# Altium PCB B45120517E.PcbDoc (part 2 of 2)
Units mil, origin at the board's own origin, x right, y up, seen from the top; angles counter-clockwise.
Board outline 4000 x 6000 mil, 2 copper layers (Top Layer, Bottom Layer); 156 components, 88 nets, 425 pads, 290 vias.
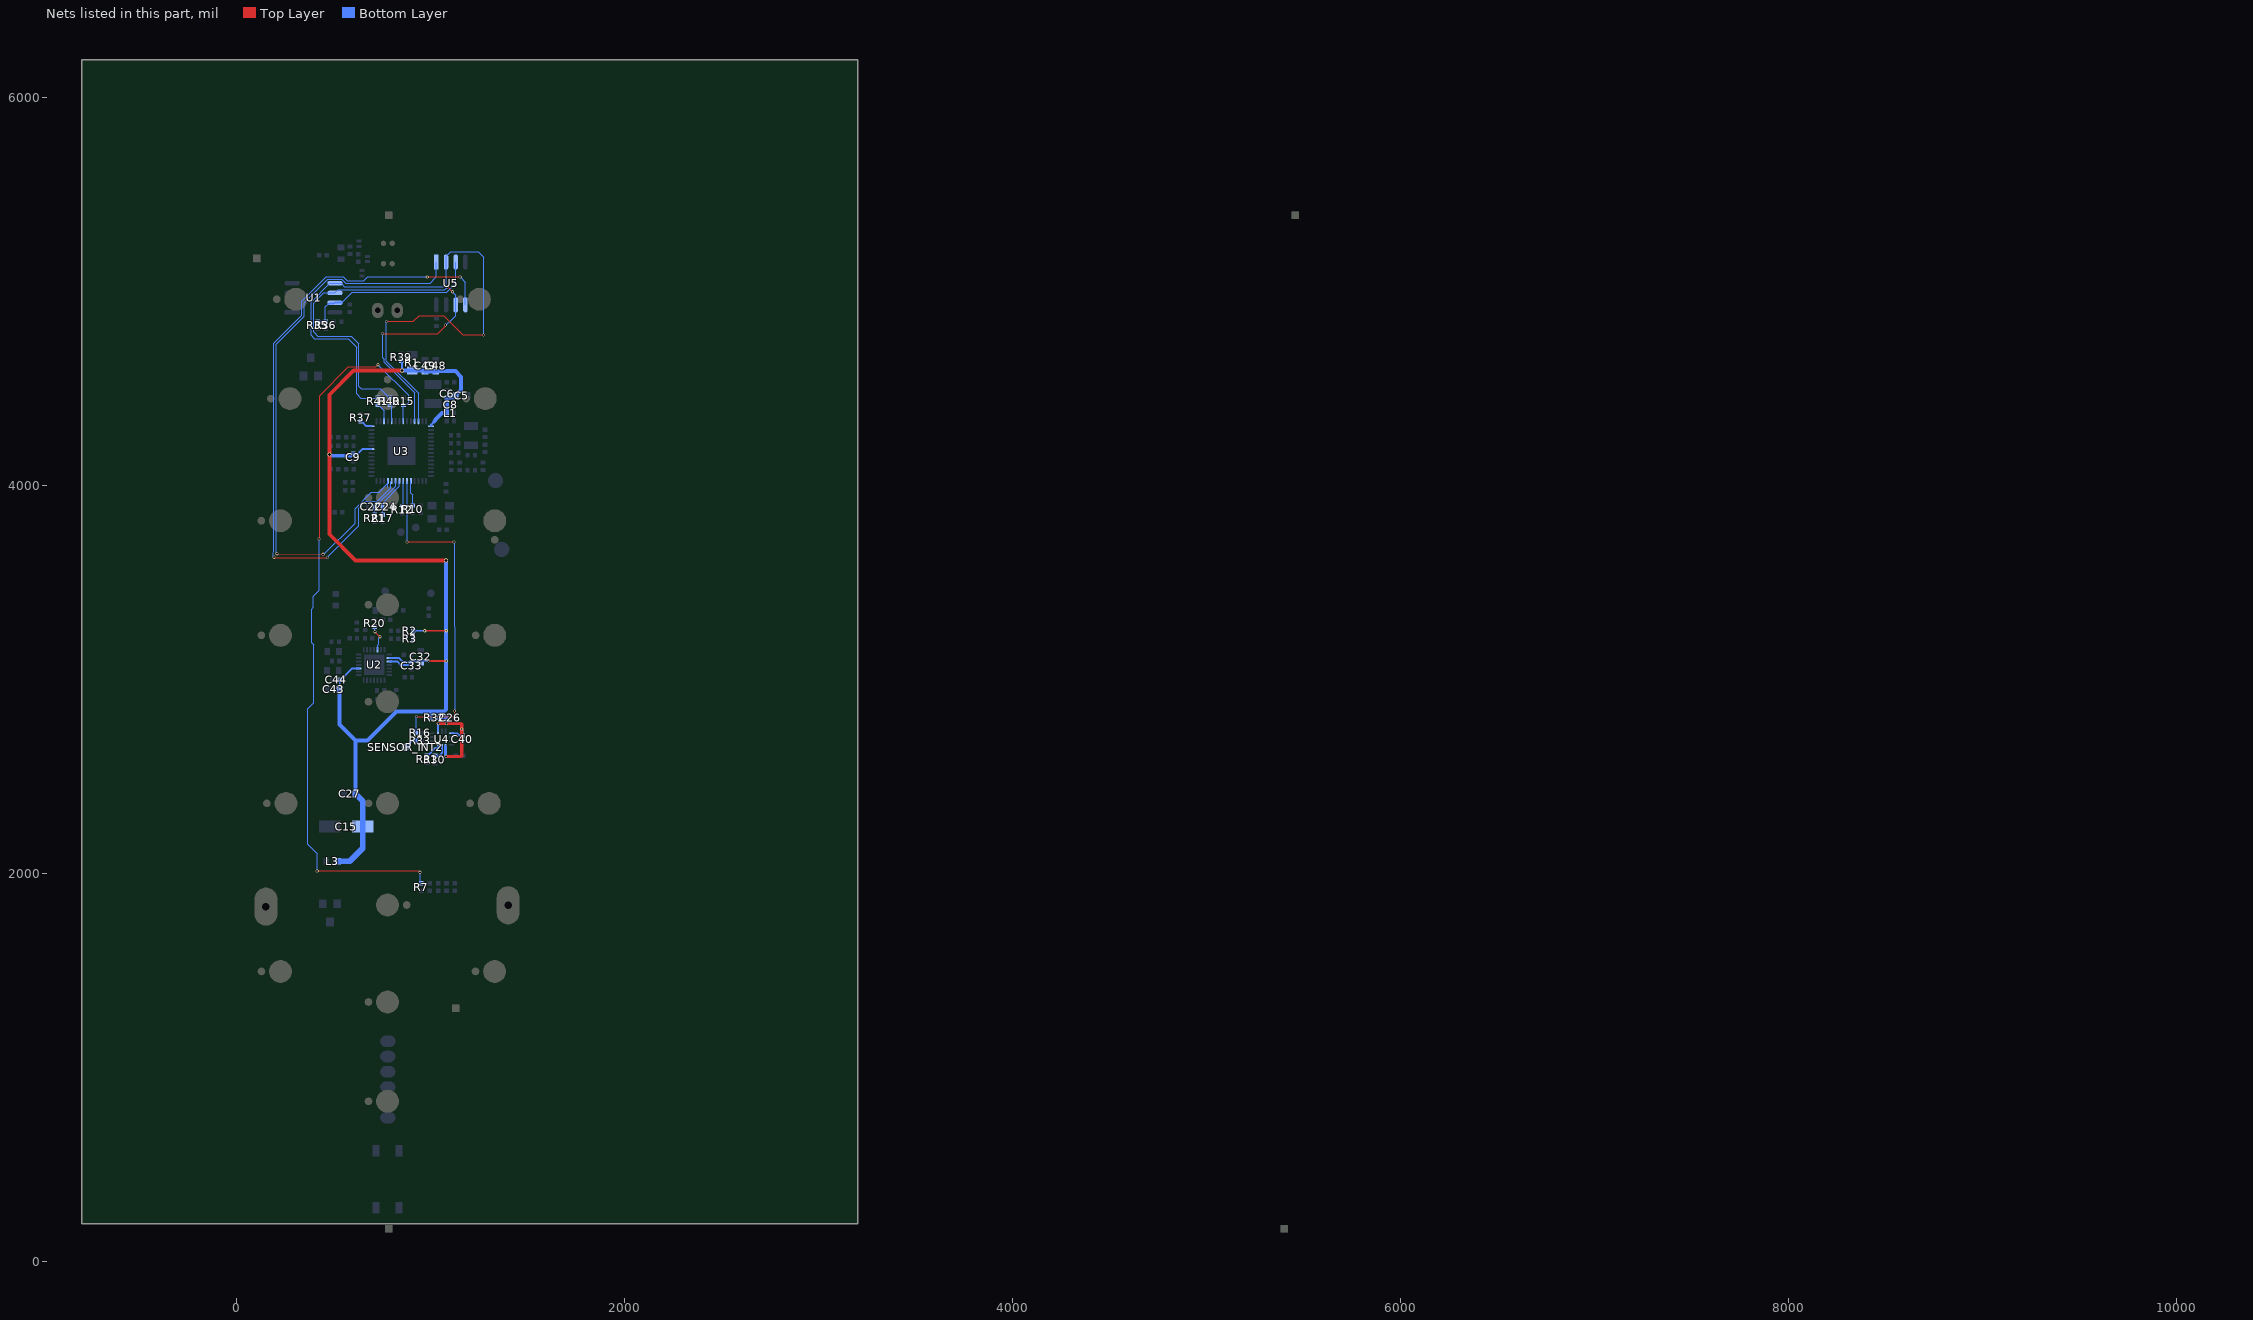
[diagram p2: the nets of this part, all layers, seen from the top]

## Via types
v1: diameter 16, hole 10, Top Layer to Bottom Layer, tented both sides, 284 vias
v2: diameter 20, hole 16, Top Layer to Bottom Layer, tented both sides, 6 vias

## Nets (pads, with @x,y where several pads share a name; then routed paths per layer and width w, separated by ;. In a path a pad name is that pad's centre, name@x,y a point inside that pad or via, vN(x,y) a via of type N, cw(c..) or ccw(c..) an arc to the next point about the centre after c; other vN are vias at no path point) (continued)
NetR20_1: R20.1 U2.26 | length 129.3
  Top Layer w6: v1(715,3247) v1@738,3224
  Bottom Layer w6: v1(715,3247) R20.1@715,3272 ; U2.26@728.72,3154.74 728.72,3177.75 734,3183.03 734,3213 v1(742,3221)
NetR30_1: R30.1 U4.13 | length 74
  Bottom Layer w10: R30.1@1025,2607 1046,2607 1060.19,2621.19 U4.13@1060.19,2654.12
NetR31_1: R31.1 U4.14 | length 80.1
  Bottom Layer w10: R31.1@984,2605 1027.55,2648.55 1040.5,2648.55 U4.14@1040.5,2654.12
NetR33_1: R33.1 SENSOR_INT2.1 | length 70.5
  Bottom Layer w12: SENSOR_INT2.1@873,2651 908,2686 R33.1@929,2686
NetR37_2: R37.2 U3.42 | length 61.2
  Bottom Layer w10: R37.2@647,4331 671.89,4306.11 U3.42@697.91,4306.11
P2_1: R7.2 R15.1 U3.50 | length 3840.3
  Top Layer w6: v1(418,2014) 941,2014 v1(948,2007) v1@949,2006 ; v1@430,3722 430,4463.04 578.96,4612 720,4612 v1(731,4623)
  Bottom Layer w6: v1(418,2014) 418,2102 369,2151 369,2850 399,2880 399,3181.04 389,3191.04 389,3363.24 398,3372.24 398,3430 428,3460 v1(428,3725) ; v1(731,4623) 888.67,4465.33 888.67,4430.67 873,4415 R15.1@863,4415 861.3,4413.3 U3.50@861.3,4331.7 ; v1(948,2007) 948,1957 R7.2@955,1950
PIO3: U3.24 U5.5 | length 3264.8
  Top Layer w6: v1(195,3631) 197,3629 468,3629 v1@470,3631 ; v1(985,5076) v1(1155,5076)
  Bottom Layer w6: v1(195,3631) 192,3634 192,3655.04 195,3658.04 195,4734 339,4878 339,4950 ; 339.04,4950 349,4959.96 ; 349,4960 465,5076 553,5076 573,5056 658.16,5056 678.16,5076 v1(985,5076) ; v1(470,3630) 633,3793 633,3884 669,3920 728,3920 796.48,3988.48 796.48,4018.85 U3.24@802.24,4024.61 ; v1(1155,5076) 1182,5049 U5.5@1182,4931.76
PIO4: U3.25 U5.1 | length 2983.7
  Top Layer w6: v1(210,3649) v1(448.04,3646)
  Bottom Layer w6: v1@208,3648 208,4729 351,4872 351,4941.75 473.06,5063.81 545.42,5063.81 565.23,5044 1000,5044 1032,5076 U5.1@1032,5152.23 ; v1(448.04,3646) 452,3646 613,3807 613,3881.76 697.24,3966 737,3966 U3.25@782.56,4011.56 ; 782.56,3991.53 U3.25@782.56,4011.56 ; U3.25@782.56,4024.61 U3.25@782.56,4011.56 ; U3.25@783,4012 U3.25@782.56,4011.56
RX: R12.1 U3.21 | length 128.6
  Bottom Layer w6: R12.1@861.3,3896 U3.21@861.3,4024.61
SCL: R40.2 U1.6 U3.53 U5.6 | length 2640.2
  Top Layer w6: v1(755,4783) 1038,4783 1080,4825 v1(1080,4827) ; v1(1090,5024) v1(1115,4999)
  Bottom Layer w6: v1(755,4783) 755,4658 762.69,4650.31 762.69,4635.34 920.35,4477.68 U3.53@920.35,4331.7 ; R40.2@793,4454 793,4459 783,4459 742,4500 646,4500 633,4513 633,4731 594,4770 421.27,4770 399,4792.27 399,4941 451,4993 U1.6@509.24,4993 526.24,5010 1076,5010 v1(1090,5024) ; v1(1080,4827) 1111,4854 1132,4875 U5.6@1132,4931.76 1132,4982 v1(1115,4999)
SCL1: C24.2 R17.2 U3.22 | length 210.9
  Bottom Layer w6: R17.2@756,3850 755,3851 C24.2@755,3891 755,3910 841.61,3996.61 U3.22@841.61,4024.61
SCL-1: R40.1 U3.47 | length 88.1
  Bottom Layer w6: R40.1@793,4416 802.24,4406.76 U3.47@802.24,4331.7
SDA: R41.2 U1.5 U3.54 U5.2 | length 3435.3
  Top Layer w6: v1(774.69,4846) 914,4846 944,4876 1070,4876 1169,4777 v1(1276,4777)
  Bottom Layer w6: R41.2@731,4451 642.14,4451 621,4472.14 621,4714 577,4758 404,4758 386,4776 386,4946 483,5043 U1.5@509.24,5043 541.2,5043 558.2,5026 1068.2,5026 1073,5030.8 1073,5031.04 1082.01,5040.06 U5.2@1082.01,5152.24 1082.01,5181 1107.01,5206 1247,5206 1276,5177 v1(1276,4777) ; v1(774.69,4846) 774.69,4640.31 940.04,4474.96 U3.54@940.04,4331.7
SDA1: C22.2 R21.2 U3.23 | length 218.9
  Bottom Layer w6: R21.2@715,3850 C22.2@715,3890 ; C22.2@715,3890 821.93,3996.96 U3.23@821.93,4024.61
SDA-1: R41.1 U3.45 | length 97.8
  Bottom Layer w6: R41.1@731.5,4416.5 762.87,4385.13 U3.45@762.87,4331.7
SENSOR_INT: R16.1 U3.20 | length 1730.2
  Top Layer w6: v1(880.98,3710) v1@1123,3710 ; v1(929,2809) 1115,2809 1126,2820 v1(1126,2838)
  Bottom Layer w6: v1(880.98,3710) U3.20@880.98,4024.61 ; R16.1@929,2727 v1(929,2809) ; v1(1124,3710) v1(1126,2838)
TX: R10.1 U3.19 | length 132.5
  Bottom Layer w6: U3.19@900.67,4024.61 900.67,3961.67 910,3952.34 R10.1@910,3896
VBAT: C5.1 C6.1 C8.1 C9.1 C15.1 C27.1 C32.1 C33.1 C43.1 C44.1 C48.1 C49.1 L1.1 L3.1 R1.2 R2.1 R3.1 R32.2 R39.2 U2.2 U2.3 U2.17 U3.1 U3.36 | length 5921
  Top Layer w10: v1(972,3252) v1(1083,3252) ; v1(992,3097) v1(1083,3097)
  Top Layer w20: v2(854,4593) 606,4593 481,4468 v2(481,4160) 481,3749 616,3614 v2(1082,3614)
  Bottom Layer w10: C43.1@533,2950 534,2951 C44.1@534,2999 540,2999 599.28,3058.28 U2.17@632.26,3058.28 ; C9.1@603,4164 627,4164 651,4188 U3.36@697.91,4188 ; U2.3@789.74,3093.72 830.28,3093.72 849,3075 887,3075 C33.1@902,3090 ; U2.2@789.74,3111.43 840.57,3111.43 862,3090 C33.1@902,3090 ; v2(854,4593) R39.2@854,4640 ; R3.1@912,3211 R3.1@913,3211 R2.1@913,3252 ; R2.1@915,3252 v1(972,3252) ; v1(992,3097) 913,3097 C33.1@906,3090 C33.1@902,3090 ; U3.1@1005,4306.11 1005,4314.63 1021.37,4331
  Bottom Layer w20: v2(481,4160) 487,4154 593,4154 C9.1@603,4164 ; C43.1@533,2950 533,2768 615,2686 616,2687 ; C27.1@616,2411 616,2687 ; v2(854,4593) R1.2@908,4593 968,4593 C49.1@974,4587 C48.1@1029,4587 1032,4590 1130,4590 1160,4560 1160,4492 C5.1@1132,4464 1123,4455 C6.1@1087,4455 1087,4376 L1.1@1085,4374 1062.06,4374 1028,4339.94 1028,4337.63 1021.37,4331 ; R32.2@1005.19,2804 1005.19,2829.39 ; v2(1082,3614) 1082,2846 1072,2836 826,2836 677,2687 616,2687
  Bottom Layer w30: L3.1@525,2064 586,2064 652.84,2130.84 C15.1@652.84,2243 652.84,2374.16 C27.1@616,2411
VDD_SENSOR: C26.1 C40.1 R32.1 U4.5 U4.8 U4.12 | length 624.3
  Top Layer w16: v1@1042,2773.19 v1(1084.19,2773.19) 1159.81,2773.19 1163,2770 v1(1163,2745) 1163,2606 1160,2603 v1(1081,2603)
  Bottom Layer w10: U4.5@1040.5,2733.88 v1@1040.5,2771.5 ; U4.8@1109.91,2723.53 1138.47,2723.53 1149,2713 C40.1@1166,2713
  Bottom Layer w16: U4.12@1079.87,2654.12 1079.87,2604.13 v1(1081,2603) ; v1(1084.19,2773.19) C26.1@1084.19,2804 ; v1(1163,2745) 1163,2716 C40.1@1166,2713
  Bottom Layer w20: R32.1@1043.19,2804 C26.1@1084.19,2804
  other v1: 1042,2773
WP: R35.2 R36.2 U1.7 U5.3 | length 947.6
  Bottom Layer w6: R36.2@460.69,4846 460.69,4920.69 U1.7@478.87,4938.87 ; U1.7@545,4943 598,4996 1086.04,4996 1132.01,5041.97 U5.3@1132.01,5152.24
  Bottom Layer w10: R35.2@420,4845 459.69,4845 R36.2@460.69,4846 ; U1.7@478.87,4938.87 505.11,4938.87 U1.7@509.24,4943 U1.7@545,4943
pads on no net: MARK1.1 MARK1.4 MARK2.1 MARK2.4 MARK3.1 MARK3.4 MARK4.1 MARK4.4 MARK5.1 MARK5.4 MARK6.1 MARK6.4 MARK7.1 MARK7.4 MARK8.1 MARK8.4 MARK9.1 MARK10.1 MARK10.4 MARK11.1 MARK12.1 MARK12.4 U2.9 U2.10 U2.11 U2.12 U2.14 U2.15 U2.16 U2.23 U2.24 U3.0@669.44,4070.14 U3.0@669.44,4168.17 U3.0@669.44,4267.15 U3.0@762.47,4358.17 U3.0@782.47,3996.17 U3.0@861.45,4358.17 U3.0@880.46,3996.17 U3.0@959.44,4358.17 U3.0@979.44,3996.17 U3.0@1033.46,4129.16 U3.0@1033.46,4227.15 U3.2 U3.16 U3.17 U3.18 U3.32 U3.33 U3.51 U4.2 U4.3 U4.9 U4.10
copper on no net: | length 9.1
  Top Layer w6: 637,4407 637,4409
  Bottom Layer w10: 541,5227 546,5232

## Polygon pours and split planes (outlines as drawn)
GND on Top Layer (solid, remove dead copper, pour order 54): 11,5321 1724,5321 1724,341 1613,230 1606.78,236.22 0,236.22
AGND on Top Layer (solid, remove dead copper, pour order 52): 421.41,3407 1030.59,3407 1030.59,2870 421.59,2870
GND on Top Layer "Top Layer-GND" (solid, pour order 10): -316,1665
GND on Top Layer "Top Layer-GND 1" (solid, pour order 8): -122,1549
GND on Bottom Layer (solid, remove dead copper, pour order 56): -7,5312 1696,5312 1724,5284 1724,240 -35,240
AGND on Bottom Layer (solid, remove dead copper, pour order 48): 421,3407 1030.19,3407 1030.19,2870 421.19,2870
GND on Bottom Layer (solid, remove dead copper, pour order 42): -2887,5266

## Keep-outs
Top Overlay:
  circle w5: c1344.84,4217.32 r19.68
  circle w5: c1337.36,4025.59 r31.5
  circle w5: c1344.84,3831.5 r19.68
  circle w5: c1368.78,3671.3 r31.5
Keep-Out Layer:
  lines w5: 496.06,5326.77 496.06,5220.47 55.12,5220.47 55.12,4761.42 0,4761.42 0,4311.03 ; 622.05,236.24 933.07,236.24 ; 2183.39,236.24 2494.41,236.24 ; 3122.66,4761.42 3067.54,4761.42 3067.54,5220.48 2626.59,5220.48 2626.59,5326.78 2057.4,5326.78 2057.4,5220.48 1616.46,5220.48 1616.46,4761.42 1561.34,4761.42 ; 3744.72,236.24 4055.75,236.24 ; 3745.86,1240.16 3745.86,236.61 4060.82,236.61 4060.82,1240.16 4684.02,1240.16 ; 3745.87,1240.16 3122.68,1240.16 ; 4628.86,1712.6 4684.02,1712.6 ; 4628.86,2992.13 4684.02,2992.13 ; 4628.86,3996.06 4684.02,3996.06 ; 4628.86,4311.02 4684.02,4311.02 ; 4628.88,1712.6 4628.88,2992.13 ; 4628.88,3996.06 4628.88,4311.03 ; 4684,4761.42 4628.88,4761.42 4628.88,5220.47 4187.93,5220.47 4187.93,5326.77 3618.74,5326.77 3618.74,5220.47 3177.8,5220.47 3177.8,4761.42 3122.68,4761.42 3122.68,4311.02 ; 5306.06,236.24 5617.09,236.24 ; 5622.16,1240.16 5622.16,236.61 5307.19,236.61 5307.19,1240.16 4684.02,1240.16 ; 5622.17,1240.16 6245.35,1240.16 6245.35,1712.6 6190.2,1712.6 ; 6190.2,2992.13 6245.35,2992.13 6245.35,3996.06 6190.2,3996.06 ; 6190.2,4311.02 6245.35,4311.02 6245.35,4761.42 6190.22,4761.42 6190.22,5220.48 5749.27,5220.48 5749.27,5326.78 5180.08,5326.78 5180.08,5220.48 4739.13,5220.48 4739.13,4761.42 4684.02,4761.42 4684.02,4311.02 ; 6190.22,1712.6 6190.22,2992.13 ; 6190.22,3996.06 6190.22,4311.03 ; 6205.99,-0.22 ccw(c6205.99,39.15) 6245.36,39.15 6245.36,236.02 ; 6205.99,0 904.96,0 39.37,0 cw(c39.37,39.37) 0,39.37 0,236.22 6245.35,236.22 ; 0,1240.16 623.18,1240.16 ; 0,1240.16 0,1712.6 ; 0,1240.16 623.19,1240.16 ; 0,1240.16 0,1712.6 ; 0,1240.16 0,1712.6 ; 0,1240.16 623.18,1240.16 ; 0,1712.6 55.12,1712.6 ; 0,1712.6 55.12,1712.6 ; 0,1712.6 55.12,1712.6 ; 0,2992.13 0,3996.06 ; 0,2992.13 55.12,2992.13 ; 0,2992.13 0,3996.06 ; 0,2992.13 55.12,2992.13 ; 0,2992.13 0,3996.06 ; 0,2992.13 55.12,2992.13 ; 0,3996.06 55.12,3996.06 ; 0,3996.06 55.12,3996.06 ; 0,3996.06 55.12,3996.06 ; 0,4311.03 55.12,4311.03 ; 0,4311.02 55.12,4311.02 ; 0,4311.03 55.12,4311.03 ; 55.12,1712.6 55.12,2992.13 ; 55.12,1712.6 55.12,2992.13 ; 55.12,1712.6 55.12,2992.13 ; 55.12,3996.06 55.12,4311.03 ; 55.12,3996.06 55.12,4311.03 ; 55.12,3996.06 55.12,4311.03 ; 475.54,4681.44 cw(c538.53,4681.44) 601.53,4681.44 ; 475.54,4681.44 ccw(c538.53,4681.44) 601.53,4681.44 ; 475.54,4681.44 cw(c538.53,4681.44) 601.53,4681.44 ; 475.54,4681.44 ccw(c538.53,4681.44) 601.53,4681.44 ; 623.18,236.61 938.14,236.61 ; 623.18,236.61 623.18,1240.16 ; 623.18,236.61 938.14,236.61 ; 623.18,236.61 623.18,1240.16 ; 623.18,236.61 937.8,236.61 937.8,1240.16 1561.32,1240.16 ; 623.18,236.61 623.18,1240.16 ; 938.14,236.61 937.46,1240.16 1561.32,1240.16 ; 938.14,236.61 938.14,1240.16 1561.34,1240.16 ; 986.58,1604.74 cw(c1049.57,1604.74) 1112.56,1604.74 cw(c1049.57,1604.74) 986.58,1604.74 ; 986.56,1604.72 cw(c1049.56,1604.72) 1112.55,1604.72 cw(c1049.56,1604.72) 986.56,1604.72 ; 1065.24,5326.77 6245.35,5326.77 6245.35,5523.64 ccw(c6205.98,5523.64) 6205.98,5563.01 1006.95,5562.99 39.37,5562.99 ccw(c39.37,5523.62) 0,5523.62 0,5326.77 1065.26,5326.77 ; 1065.26,5326.77 1065.26,5220.47 1506.2,5220.47 1506.2,4761.42 1561.32,4761.42 ; 1506.2,1712.6 1561.32,1712.6 ; 1506.2,1712.6 1506.2,2992.13 ; 1506.18,1712.6 1561.34,1712.6 ; 1506.2,1712.6 1506.2,2992.13 ; 1506.2,1712.6 1561.32,1712.6 ; 1506.2,1712.6 1506.2,2992.13 ; 1506.2,2992.13 1561.32,2992.13 ; 1506.18,2992.13 1561.34,2992.13 ; 1506.2,2992.13 1561.32,2992.13 ; 1506.2,3996.06 1561.32,3996.06 ; 1506.2,3996.06 1506.2,4311.03 ; 1506.2,3996.06 1506.2,4311.03 ; 1506.18,3996.06 1561.34,3996.06 ; 1506.2,3996.06 1506.2,4311.03 ; 1506.2,3996.06 1561.32,3996.06 ; 1506.2,4311.03 1561.32,4311.03 ; 1506.18,4311.02 1561.34,4311.02 ; 1506.2,4311.03 1561.32,4311.03 ; 1561.32,1240.16 1561.32,1712.6 ; 1561.34,1240.16 1561.34,1712.6 ; 1561.34,1240.16 2184.53,1240.16 2184.52,236.61 2499.48,236.61 2499.48,1240.16 3122.68,1240.16 ; 1561.34,1240.16 1561.34,1712.6 ; 1561.32,1240.16 1561.32,1712.6 ; 1561.34,1712.6 1616.46,1712.6 1616.46,2992.13 1561.34,2992.13 ; 1561.32,2992.13 1561.32,3996.06 ; 1561.34,2992.13 1561.34,3996.06 ; 1561.34,2992.13 1561.34,3996.06 ; 1561.32,2992.13 1561.32,3996.06 ; 1561.34,3996.06 1616.46,3996.06 1616.46,4311.03 1561.34,4311.02 ; 1561.32,4311.03 1561.32,4761.42 ; 2036.88,4681.44 cw(c2099.87,4681.44) 2162.86,4681.44 ; 2036.88,4681.44 ccw(c2099.87,4681.44) 2162.86,4681.44 ; 2036.88,4681.44 cw(c2099.87,4681.44) 2162.86,4681.44 ; 2036.88,4681.44 ccw(c2099.87,4681.44) 2162.86,4681.44 ; 2673.89,1604.73 ccw(c2610.9,1604.73) 2547.9,1604.73 ccw(c2610.9,1604.73) 2673.89,1604.73 ; 2673.9,1604.74 ccw(c2610.91,1604.74) 2547.92,1604.74 ccw(c2610.91,1604.74) 2673.9,1604.74 ; 3122.68,1240.16 3122.68,1712.6 ; 3122.68,1240.16 3122.68,1712.6 ; 3122.68,1712.6 3177.8,1712.6 3177.8,2992.13 3122.68,2992.13 ; 3122.68,1712.6 3067.52,1712.6 3067.54,2992.13 3122.68,2992.13 ; 3122.68,2992.13 3122.68,3996.06 ; 3122.68,2992.13 3122.68,3996.06 ; 3122.68,3996.06 3177.8,3996.06 3177.8,4311.03 3122.68,4311.02 ; 3122.68,3996.06 3067.52,3996.06 3067.54,4311.03 3122.68,4311.02 ; 3598.22,4681.44 cw(c3661.21,4681.44) 3724.2,4681.44 ; 3598.22,4681.44 ccw(c3661.21,4681.44) 3724.2,4681.44 ; 3598.22,4681.44 cw(c3661.21,4681.44) 3724.2,4681.44 ; 3598.22,4681.44 ccw(c3661.21,4681.44) 3724.2,4681.44 ; 4109.24,1604.72 cw(c4172.23,1604.72) 4235.23,1604.72 ; 4109.24,1604.72 ccw(c4172.23,1604.72) 4235.23,1604.72 ; 4109.26,1604.74 cw(c4172.25,1604.74) 4235.24,1604.74 ; 4109.26,1604.74 ccw(c4172.25,1604.74) 4235.24,1604.74 ; 4684.02,1240.16 4684.02,1712.6 ; 4684.02,1240.16 4684.02,1712.6 ; 4684.02,1712.6 4739.13,1712.6 4739.13,2992.13 4684.02,2992.13 ; 4684.02,2992.13 4684.02,3996.06 ; 4684.02,2992.13 4684.02,3996.06 ; 4684.02,3996.06 4739.13,3996.06 4739.13,4311.03 4684.02,4311.02 ; 5159.56,4681.44 cw(c5222.55,4681.44) 5285.54,4681.44 ; 5159.56,4681.44 ccw(c5222.55,4681.44) 5285.54,4681.44 ; 5159.56,4681.44 cw(c5222.55,4681.44) 5285.54,4681.44 ; 5159.56,4681.44 ccw(c5222.55,4681.44) 5285.54,4681.44 ; 5670.58,1604.73 cw(c5733.57,1604.73) 5796.57,1604.73 ; 5670.58,1604.73 ccw(c5733.57,1604.73) 5796.57,1604.73 ; 5670.6,1604.74 cw(c5733.59,1604.74) 5796.58,1604.74 ; 5670.6,1604.74 ccw(c5733.59,1604.74) 5796.58,1604.74 ; 137.8,118.11 cw(c196.85,118.11) 255.91,118.11 cw(c196.85,118.11) 137.8,118.11 ; 137.8,5444.88 cw(c196.85,5444.88) 255.91,5444.88 cw(c196.85,5444.88) 137.8,5444.88 ; 5989.45,117.91 cw(c6048.51,117.91) 6107.56,117.91 cw(c6048.51,117.91) 5989.45,117.91 ; 5989.45,5444.88 cw(c6048.5,5444.88) 6107.56,5444.88 cw(c6048.5,5444.88) 5989.45,5444.88

## Other copper
Top Layer:
  pour cut-out: 402.59,3407 402.59,2851 1053.59,2851 1055.59,3422 1054.59,3429 651.68,3429.41 628.03,3429.44 419.59,3429 402.59,3407 1030.59,3407 1030.59,2870 421.59,2870 421.41,3407
  pour cut-out: 714.8,4044.76 728.8,4051.76 743.8,4057.76 756.8,4060.76 769.8,4062.76 785.8,4062.76 801.8,4061.76 818.8,4056.76 831.8,4052.76 848.8,4043.76 860.8,4035.76 871.8,4025.76 881.8,4014.76 889.8,4002.76 894.8,3992.76 899.8,3980.76 903.8,3967.76 905.8,3955.76 906.77,3937.01 906.8,3921.76 903.8,3905.76 897.8,3887.76 890.8,3873.76 883.8,3862.76 873.8,3850.76 860.8,3839.76 849.8,3831.76 834.8,3822.76 822.8,3817.76 807.8,3813.76 793.8,3811.76 778.8,3810.76 760.8,3812.76 742.8,3816.76 726.8,3823.76 714.8,3829.76 705.8,3836.76 692.8,3846.76 688.8,3851.76 678.8,3863.76 670.8,3874.76 665.8,3885.76 660.8,3897.76 657.8,3909.76 655.8,3921.76 654.8,3933.76 655.8,3946.76 657.8,3960.76 661.8,3974.76 666.8,3988.76 672.8,4001.76 678.8,4011.76 687.8,4022.76 698.8,4033.76
  pour cut-out: 714.68,4556.06 728.68,4563.06 743.68,4569.06 756.68,4572.06 769.68,4574.06 785.68,4574.06 801.68,4573.06 818.68,4568.06 831.68,4564.06 848.68,4555.06 860.68,4547.06 871.68,4537.06 881.68,4526.06 889.68,4514.06 894.68,4504.06 899.68,4492.06 903.68,4479.06 905.68,4467.06 906.65,4448.31 906.68,4433.06 903.68,4417.06 897.68,4399.06 890.68,4385.06 883.68,4374.06 873.68,4362.06 860.68,4351.06 849.68,4343.06 834.68,4334.06 822.68,4329.06 807.68,4325.06 793.68,4323.06 778.68,4322.06 760.68,4324.06 742.68,4328.06 726.68,4335.06 714.68,4341.06 705.68,4348.06 692.68,4358.06 688.68,4363.06 678.68,4375.06 670.68,4386.06 665.68,4397.06 660.68,4409.06 657.68,4421.06 655.68,4433.06 654.68,4445.06 655.68,4458.06 657.68,4472.06 661.68,4486.06 666.68,4500.06 672.68,4513.06 678.68,4523.06 687.68,4534.06 698.68,4545.06
  pour cut-out: 1324.52,1909 1324.52,1672.78 1482,1672.78 1482,1909
  pour cut-out: 228.19,3367 240.19,3367 260.19,3363 279.19,3357 299.19,3347 316.19,3335 329.19,3323 340.19,3310 351.19,3293 359.19,3275 363.19,3258 366.19,3239 366.22,3228.35 366.19,3212 363.19,3193 359.19,3180 351.19,3163 343.19,3149 332.19,3136 319.19,3123 309.19,3115 299.19,3108 289.19,3104 272.19,3098 257.19,3093 234.19,3091 207.19,3092 187.19,3096 167.19,3104 150.19,3115 133.19,3128 117.19,3146 105.19,3165 96.19,3186 91.19,3208 89.19,3229 92.19,3255 99.19,3279 113.19,3305 132.19,3329 155.19,3346 174.19,3356 198.19,3364
  pour cut-out: 307.52,5099.28 319.52,5099.28 339.52,5095.28 358.52,5089.28 378.52,5079.28 395.52,5067.28 408.52,5055.28 419.52,5042.28 430.52,5025.28 438.52,5007.28 442.52,4990.28 445.52,4971.28 445.55,4960.63 445.52,4944.28 442.52,4925.28 438.52,4912.28 430.52,4895.28 422.52,4881.28 411.52,4868.28 398.52,4855.28 388.52,4847.28 378.52,4840.28 368.52,4836.28 351.52,4830.28 336.52,4825.28 313.52,4823.28 286.52,4824.28 266.52,4828.28 246.52,4836.28 229.52,4847.28 212.52,4860.28 196.52,4878.28 184.52,4897.28 175.52,4918.28 170.52,4940.28 168.52,4961.28 171.52,4987.28 178.52,5011.28 192.52,5037.28 211.52,5061.28 234.52,5078.28 253.52,5088.28 277.52,5096.28
  pour cut-out: 1253.35,5099.28 1265.35,5099.28 1285.35,5095.28 1304.35,5089.28 1324.35,5079.28 1341.35,5067.28 1354.35,5055.28 1365.35,5042.28 1376.35,5025.28 1384.35,5007.28 1388.35,4990.28 1391.35,4971.28 1391.38,4960.63 1391.35,4944.28 1388.35,4925.28 1384.35,4912.28 1376.35,4895.28 1368.35,4881.28 1357.35,4868.28 1344.35,4855.28 1334.35,4847.28 1324.35,4840.28 1314.35,4836.28 1297.35,4830.28 1282.35,4825.28 1259.35,4823.28 1232.35,4824.28 1212.35,4828.28 1192.35,4836.28 1175.35,4847.28 1158.35,4860.28 1142.35,4878.28 1130.35,4897.28 1121.35,4918.28 1116.35,4940.28 1114.35,4961.28 1117.35,4987.28 1124.35,5011.28 1138.35,5037.28 1157.35,5061.28 1180.35,5078.28 1199.35,5088.28 1223.35,5096.28
  pour cut-out: 277.05,4586.96 289.05,4586.96 309.05,4582.96 328.05,4576.96 348.05,4566.96 365.05,4554.96 378.05,4542.96 389.05,4529.96 400.05,4512.96 408.05,4494.96 412.05,4477.96 415.05,4458.96 415.08,4448.31 415.05,4431.96 412.05,4412.96 408.05,4399.96 400.05,4382.96 392.05,4368.96 381.05,4355.96 368.05,4342.96 358.05,4334.96 348.05,4327.96 338.05,4323.96 321.05,4317.96 306.05,4312.96 283.05,4310.96 256.05,4311.96 236.05,4315.96 216.05,4323.96 199.05,4334.96 182.05,4347.96 166.05,4365.96 154.05,4384.96 145.05,4405.96 140.05,4427.96 138.05,4448.96 141.05,4474.96 148.05,4498.96 162.05,4524.96 181.05,4548.96 204.05,4565.96 223.05,4575.96 247.05,4583.96
  pour cut-out: 1283.78,4586.96 1295.78,4586.96 1315.78,4582.96 1334.78,4576.96 1354.78,4566.96 1371.78,4554.96 1384.78,4542.96 1395.78,4529.96 1406.78,4512.96 1414.78,4494.96 1418.78,4477.96 1421.78,4458.96 1421.81,4448.31 1421.78,4431.96 1418.78,4412.96 1414.78,4399.96 1406.78,4382.96 1398.78,4368.96 1387.78,4355.96 1374.78,4342.96 1364.78,4334.96 1354.78,4327.96 1344.78,4323.96 1327.78,4317.96 1312.78,4312.96 1289.78,4310.96 1262.78,4311.96 1242.78,4315.96 1222.78,4323.96 1205.78,4334.96 1188.78,4347.96 1172.78,4365.96 1160.78,4384.96 1158.19,4406 1151.19,4428 1144.78,4448.96 1147.78,4474.96 1154.78,4498.96 1168.78,4524.96 1187.78,4548.96 1210.78,4565.96 1229.78,4575.96 1253.78,4583.96
  pour cut-out: 228.19,3957.55 240.19,3957.55 260.19,3953.55 279.19,3947.55 299.19,3937.55 316.19,3925.55 329.19,3913.55 340.19,3900.55 351.19,3883.55 359.19,3865.55 363.19,3848.55 366.19,3829.55 366.22,3818.9 366.19,3802.55 363.19,3783.55 359.19,3770.55 351.19,3753.55 343.19,3739.55 332.19,3726.55 319.19,3713.55 309.19,3705.55 299.19,3698.55 289.19,3694.55 272.19,3688.55 257.19,3683.55 234.19,3681.55 207.19,3682.55 187.19,3686.55 167.19,3694.55 150.19,3705.55 133.19,3718.55 117.19,3736.55 105.19,3755.55 96.19,3776.55 91.19,3798.55 89.19,3819.55 92.19,3845.55 99.19,3869.55 113.19,3895.55 132.19,3919.55 155.19,3936.55 174.19,3946.55 198.19,3954.55
  pour cut-out: 1332.68,3957.55 1344.68,3957.55 1364.68,3953.55 1383.68,3947.55 1403.68,3937.55 1420.68,3925.55 1433.68,3913.55 1444.68,3900.55 1455.68,3883.55 1463.68,3865.55 1467.68,3848.55 1470.68,3829.55 1470.71,3818.9 1470.68,3802.55 1467.68,3783.55 1463.68,3770.55 1455.68,3753.55 1447.68,3739.55 1436.68,3726.55 1423.68,3713.55 1413.68,3705.55 1403.68,3698.55 1393.68,3694.55 1376.68,3688.55 1361.68,3683.55 1338.68,3681.55 1311.68,3682.55 1291.68,3686.55 1271.68,3694.55 1254.68,3705.55 1237.68,3718.55 1221.68,3736.55 1209.68,3755.55 1200.68,3776.55 1195.68,3798.55 1193.68,3819.55 1196.68,3845.55 1203.68,3869.55 1217.68,3895.55 1236.68,3919.55 1259.68,3936.55 1278.68,3946.55 1302.68,3954.55
  pour cut-out: 714.68,3493.57 728.68,3500.57 743.68,3506.57 756.68,3509.57 769.68,3511.57 785.68,3511.57 801.68,3510.57 818.68,3505.57 831.68,3501.57 848.68,3492.57 860.68,3484.57 871.68,3474.57 881.68,3463.57 889.68,3451.57 894.68,3441.57 899.68,3429.57 903.68,3416.57 905.68,3404.57 906.65,3385.83 906.68,3370.57 903.68,3354.57 897.68,3336.57 890.68,3322.57 883.68,3311.57 873.68,3299.57 860.68,3288.57 849.68,3280.57 834.68,3271.57 822.68,3266.57 807.68,3262.57 793.68,3260.57 778.68,3259.57 760.68,3261.57 742.68,3265.57 726.68,3272.57 714.68,3278.57 705.68,3285.57 692.68,3295.57 688.68,3300.57 678.68,3312.57 670.68,3323.57 665.68,3334.57 660.68,3346.57 657.68,3358.57 655.68,3370.57 654.68,3382.57 655.68,3395.57 657.68,3409.57 661.68,3423.57 666.68,3437.57 672.68,3450.57 678.68,3460.57 687.68,3471.57 698.68,3482.57
  pour cut-out: 1332.68,3367 1344.68,3367 1364.68,3363 1383.68,3357 1403.68,3347 1420.68,3335 1433.68,3323 1444.68,3310 1455.68,3293 1463.68,3275 1467.68,3258 1470.68,3239 1470.71,3228.35 1470.68,3212 1467.68,3193 1463.68,3180 1455.68,3163 1447.68,3149 1436.68,3136 1423.68,3123 1413.68,3115 1403.68,3108 1393.68,3104 1376.68,3098 1361.68,3093 1338.68,3091 1311.68,3092 1291.68,3096 1271.68,3104 1254.68,3115 1237.68,3128 1221.68,3146 1209.68,3165 1200.68,3186 1195.68,3208 1193.68,3229 1196.68,3255 1203.68,3279 1217.68,3305 1236.68,3329 1259.68,3346 1278.68,3356 1302.68,3364
  pour cut-out: 780.43,3024.48 792.43,3024.48 812.43,3020.48 831.43,3014.48 851.43,3004.48 868.43,2992.48 881.43,2980.48 892.43,2967.48 903.43,2950.48 911.43,2932.48 915.43,2915.48 918.43,2896.48 918.46,2885.83 918.43,2869.48 915.43,2850.48 911.43,2837.48 903.43,2820.48 895.43,2806.48 884.43,2793.48 871.43,2780.48 861.43,2772.48 851.43,2765.48 841.43,2761.48 824.43,2755.48 809.43,2750.48 786.43,2748.48 759.43,2749.48 739.43,2753.48 719.43,2761.48 702.43,2772.48 685.43,2785.48 669.43,2803.48 657.43,2822.48 648.43,2843.48 643.43,2865.48 641.43,2886.48 644.43,2912.48 651.43,2936.48 665.43,2962.48 684.43,2986.48 707.43,3003.48 726.43,3013.48 750.43,3021.48
  pour cut-out: 256.81,2500.86 268.81,2500.86 288.81,2496.86 307.81,2490.86 327.81,2480.86 344.81,2468.86 357.81,2456.86 368.81,2443.86 379.81,2426.86 387.81,2408.86 391.81,2391.86 394.81,2372.86 394.84,2362.2 394.81,2345.86 391.81,2326.86 387.81,2313.86 379.81,2296.86 371.81,2282.86 360.81,2269.86 347.81,2256.86 337.81,2248.86 327.81,2241.86 317.81,2237.86 300.81,2231.86 285.81,2226.86 262.81,2224.86 235.81,2225.86 215.81,2229.86 195.81,2237.86 178.81,2248.86 161.81,2261.86 145.81,2279.86 133.81,2298.86 124.81,2319.86 119.81,2341.86 117.81,2362.86 120.81,2388.86 127.81,2412.86 141.81,2438.86 160.81,2462.86 183.81,2479.86 202.81,2489.86 226.81,2497.86
  pour cut-out: 782,2500.5 794,2500.5 814,2496.5 833,2490.5 853,2480.5 870,2468.5 883,2456.5 894,2443.5 905,2426.5 913,2408.5 917,2391.5 920,2372.5 920.03,2361.85 920,2345.5 917,2326.5 913,2313.5 905,2296.5 897,2282.5 886,2269.5 873,2256.5 863,2248.5 853,2241.5 843,2237.5 826,2231.5 811,2226.5 788,2224.5 761,2225.5 741,2229.5 721,2237.5 704,2248.5 687,2261.5 671,2279.5 659,2298.5 650,2319.5 645,2341.5 643,2362.5 646,2388.5 653,2412.5 667,2438.5 686,2462.5 709,2479.5 728,2489.5 752,2497.5
  pour cut-out: 1304.06,2500.86 1316.06,2500.86 1336.06,2496.86 1355.06,2490.86 1375.06,2480.86 1392.06,2468.86 1405.06,2456.86 1416.06,2443.86 1427.06,2426.86 1435.06,2408.86 1439.06,2391.86 1442.06,2372.86 1442.09,2362.2 1442.06,2345.86 1439.06,2326.86 1435.06,2313.86 1427.06,2296.86 1419.06,2282.86 1408.06,2269.86 1395.06,2256.86 1385.06,2248.86 1375.06,2241.86 1365.06,2237.86 1348.06,2231.86 1333.06,2226.86 1310.06,2224.86 1283.06,2225.86 1263.06,2229.86 1243.06,2237.86 1226.06,2248.86 1209.06,2261.86 1193.06,2279.86 1181.06,2298.86 1172.06,2319.86 1167.06,2341.86 1165.06,2362.86 1168.06,2388.86 1175.06,2412.86 1189.06,2438.86 1208.06,2462.86 1231.06,2479.86 1250.06,2489.86 1274.06,2497.86
  pour cut-out: 780.43,1977.24 792.43,1977.24 812.43,1973.24 831.43,1967.24 851.43,1957.24 868.43,1945.24 881.43,1933.24 892.43,1920.24 903.43,1903.24 911.43,1885.24 915.43,1868.24 918.43,1849.24 918.46,1838.58 918.43,1822.24 915.43,1803.24 911.43,1790.24 903.43,1773.24 895.43,1759.24 884.43,1746.24 871.43,1733.24 861.43,1725.24 851.43,1718.24 841.43,1714.24 824.43,1708.24 809.43,1703.24 786.43,1701.24 759.43,1702.24 739.43,1706.24 719.43,1714.24 702.43,1725.24 685.43,1738.24 669.43,1756.24 657.43,1775.24 648.43,1796.24 643.43,1818.24 641.43,1839.24 644.43,1865.24 651.43,1889.24 665.43,1915.24 684.43,1939.24 707.43,1956.24 726.43,1966.24 750.43,1974.24
  pour cut-out: 228.78,1634.72 240.78,1634.72 260.78,1630.72 279.78,1624.72 299.78,1614.72 316.78,1602.72 329.78,1590.72 340.78,1577.72 351.78,1560.72 359.78,1542.72 363.78,1525.72 366.78,1506.72 366.81,1496.06 366.78,1479.72 363.78,1460.72 359.78,1447.72 351.78,1430.72 343.78,1416.72 332.78,1403.72 319.78,1390.72 309.78,1382.72 299.78,1375.72 289.78,1371.72 272.78,1365.72 257.78,1360.72 234.78,1358.72 207.78,1359.72 187.78,1363.72 167.78,1371.72 150.78,1382.72 133.78,1395.72 117.78,1413.72 105.78,1432.72 96.78,1453.72 91.78,1475.72 89.78,1496.72 92.78,1522.72 99.78,1546.72 113.78,1572.72 132.78,1596.72 155.78,1613.72 174.78,1623.72 198.78,1631.72
  pour cut-out: 780.43,1477.24 792.43,1477.24 812.43,1473.24 831.43,1467.24 851.43,1457.24 868.43,1445.24 881.43,1433.24 892.43,1420.24 903.43,1403.24 911.43,1385.24 915.43,1368.24 918.43,1349.24 918.46,1338.58 918.43,1322.24 915.43,1303.24 911.43,1290.24 903.43,1273.24 895.43,1259.24 884.43,1246.24 871.43,1233.24 861.43,1225.24 851.43,1218.24 841.43,1214.24 824.43,1208.24 809.43,1203.24 786.43,1201.24 759.43,1202.24 739.43,1206.24 719.43,1214.24 702.43,1225.24 685.43,1238.24 669.43,1256.24 657.43,1275.24 648.43,1296.24 643.43,1318.24 641.43,1339.24 644.43,1365.24 651.43,1389.24 665.43,1415.24 684.43,1439.24 707.43,1456.24 726.43,1466.24 750.43,1474.24
  pour cut-out: 1332.09,1634.72 1344.09,1634.72 1364.09,1630.72 1383.09,1624.72 1403.09,1614.72 1420.09,1602.72 1433.09,1590.72 1444.09,1577.72 1455.09,1560.72 1463.09,1542.72 1467.09,1525.72 1470.09,1506.72 1470.12,1496.06 1470.09,1479.72 1467.09,1460.72 1463.09,1447.72 1455.09,1430.72 1447.09,1416.72 1436.09,1403.72 1423.09,1390.72 1413.09,1382.72 1403.09,1375.72 1393.09,1371.72 1376.09,1365.72 1361.09,1360.72 1338.09,1358.72 1311.09,1359.72 1291.09,1363.72 1271.09,1371.72 1254.09,1382.72 1237.09,1395.72 1221.09,1413.72 1209.09,1432.72 1200.09,1453.72 1195.09,1475.72 1193.09,1496.72 1196.09,1522.72 1203.09,1546.72 1217.09,1572.72 1236.09,1596.72 1259.09,1613.72 1278.09,1623.72 1302.09,1631.72
  pour cut-out: 780.55,965.43 792.55,965.43 812.55,961.43 831.55,955.43 851.55,945.43 868.55,933.43 881.55,921.43 892.55,908.43 903.55,891.43 911.55,873.43 912.19,853 912.19,842 912.19,826 912.19,816 912.19,806 912.19,791 911.55,778.43 903.55,761.43 895.55,747.43 884.55,734.43 871.55,721.43 861.55,713.43 851.55,706.43 841.55,702.43 824.55,696.43 809.55,691.43 786.55,689.43 759.55,690.43 739.55,694.43 719.55,702.43 702.55,713.43 685.55,726.43 669.55,744.43 657.55,763.43 651.19,784 651.19,803 651.19,824 651.19,850 651.19,862 651.55,877.43 665.55,903.43 684.55,927.43 707.55,944.43 726.55,954.43 750.55,962.43
  pour cut-out: 1222.33,5404 1222.33,4324.25 1378,4349 1378.34,3896.04 1303.3,3896.04 1303.3,3684.23 1338.68,3681.55 1340,3346 1545.97,3346.03 1570,3346 1561,5404
  pour cut-out: 691,4951 691,4861 700,4857 863,4857 871,4857 872,4951
Bottom Layer:
  pour cut-out: 402.19,3407 402.19,2851 1053.19,2851 1055.19,3422 1054.19,3429 651.28,3429.41 627.63,3429.44 419.19,3429 402.19,3407 1030.19,3407 1030.19,2870 421.19,2870 421,3407
  pour cut-out: 1170,4336 1256,4336 1256,4184 1251,4179 1168,4179
  pour cut-out: 1282,3608 1284,3610 1431,3610 1431,3740 1430,3741 1354,3741 1354,4153 1337,4170 1190,4170 1190,4079 1231,4038 1231,3615 1227,3611

## Silkscreen, mask and mechanical layers (free items; w line width, h text height)
Top Overlay:
  drawing of 1989 lines, arcs and shapes, not listed
  text "B45120517E" at 541.18,2164.02 h100
  text "9NC:5.1.9.002664" at 535.2,2075 h100
  text "9NC:5.1.9.002664" at 1535.2,65 h100
  text "B45120517E" at 2374.17,60 h100
Bottom Overlay:
  text "GND" at 811.19,1400 h40
  text "P2_1" at 807.19,1370 h40
  text "CLK" at 812.19,1330 h40
  text "CSS" at 814.19,1299 h40
  text "MOSI" at 814.19,1266 h40
  text "MISO" at 813.19,1233 h40
Mechanical 1:
  circle w5: c780.66,5230.32 r9.84
  circle w5: c538.53,4681.44 r62.99
  circle w5: c1049.56,1604.72 r62.99
  circle w5: c1332.91,3818.9 r56.02
  circle w5: c780.66,2885.83 r56.02
  circle w5: c780.66,3386.11 r56.02
  circle w5: c1304.28,2362.21 r56.02
  circle w5: c1332.91,3228.35 r56.02
  circle w5: c780.66,1838.58 r56.02
  circle w5: c780.66,2362.21 r56.02
  circle w5: c307.74,4960.63 r56.02
  circle w5: c1332.32,1496.06 r56.02
  circle w5: c780.66,1338.58 r56.02
  circle w5: c780.79,826.77 r56.02
  circle w5: c228.41,3228.35 r56.02
  circle w5: c228.41,3818.9 r56.02
  circle w5: c229,1496.06 r56.02
  circle w5: c257.04,2362.21 r56.02
  circle w5: c1284.01,4448.32 r56.02
  circle w5: c780.66,4448.32 r56.02
  circle w5: c780.66,3937.29 r56.02
  circle w5: c277.3,4448.32 r56.02
  circle w5: c1253.58,4960.63 r56.02
  circle w5: c1253.58,4960.63 r98.43
  circle w5: c277.3,4448.32 r98.43
  circle w5: c780.66,3937.29 r98.43
  circle w5: c780.66,4448.32 r98.43
  circle w5: c1284.01,4448.32 r98.43
  circle w5: c229,1496.06 r98.43
  circle w5: c780.79,826.77 r98.43
  circle w5: c780.79,826.77 r98.43
  circle w5: c1332.32,1496.06 r98.43
  circle w5: c307.74,4960.63 r98.43
  circle w5: c780.66,1838.58 r98.43
  circle w5: c257.04,2362.21 r98.43
  circle w5: c228.41,3228.35 r98.43
  circle w5: c1304.28,2362.21 r98.43
  circle w5: c1332.91,3228.35 r98.43
  circle w5: c1332.91,3818.9 r98.43
  circle w5: c228.41,3818.9 r98.43
  circle w5: c780.66,1838.58 r98.43
  circle w5: c1049.56,1604.72 r62.99
  circle w5: c538.53,4681.44 r62.99
  circle w5: c780.66,2362.2 r98.43
  circle w5: c780.66,3386.11 r98.43
  lines w5: 723.03,4899.54 cw(c731.45,4907.83) 743.26,4907.83 cw(c731.45,4907.83) 723.16,4899.41 ; 838.15,4899.41 cw(c829.87,4907.83) 838.7,4899.99 ; 839.09,4915.16 839.09,4915.22 ; 937.46,1240.16 938.14,236.61 623.18,236.61 623.18,1240.16 0,1240.16 0,1712.6 55.12,1712.6 55.12,2992.13 0,2992.13 0,3996.06 55.12,3996.06 55.12,4311.03 0,4311.03 0,4879.53 55.12,4879.53 55.12,5267.72 496.06,5267.72 496.06,5374.02 1065.26,5374.02 1065.26,5267.72 1506.2,5267.72 1506.2,4879.53 1561.32,4879.53 1561.32,4311.03 1506.2,4311.03 1506.2,3996.06 1561.32,3996.06 1561.32,2992.13 1506.2,2992.13 1506.2,1712.6 1561.32,1712.6 1561.32,1240.16 937.46,1240.16 ; 937.46,1240.16 937.46,452.76 623.86,452.76 623.86,1240.16 55.12,1240.16 55.12,5255.91 583.81,5255.91 583.81,4862.21 977.51,4862.21 977.51,5255.91 1506.2,5255.91 1506.2,1240.16 937.46,1240.16 ; 103.49,1791.34 ccw(c156.64,1791.34) 209.79,1791.34 209.79,1909.45 ccw(c156.64,1909.45) 103.49,1909.45 103.49,1791.34 ; 142.86,1746.06 ccw(c156.64,1746.06) 170.42,1746.06 170.42,1836.61 ccw(c156.64,1836.61) 142.86,1836.61 142.86,1746.06 ; 736.56,5121.66 736.56,5269.69 824.75,5269.69 824.75,5121.66 736.56,5121.66 ; 1351.53,1791.34 ccw(c1404.68,1791.34) 1457.83,1791.34 1457.83,1909.45 ccw(c1404.68,1909.45) 1351.53,1909.45 1351.53,1791.34 ; 1390.9,1746.06 ccw(c1404.68,1746.06) 1418.45,1746.06 1418.45,1836.61 ccw(c1404.68,1836.61) 1390.9,1836.61 1390.9,1746.06
Mechanical 2:
  drawing of 406 lines, arcs and shapes, not listed
Mechanical 3:
  lines w5: 421.19,2870 1030.19,2870 1030.19,3407 421.19,3407 421.19,2870
Drill Drawing:
  text ".Legend" at 2657,5355 h60

## Text inside footprints (layer, text, board x,y; h text height)
C15: Bottom Overlay "+" at 755.19,2276 h40 r180
TECH: Top Overlay "2" at 8884.19,1964 h60; Top Overlay "1.2mm" at 8884.19,1854 h60; Top Overlay "35uM" at 8884.19,1734 h60; Top Overlay "non" at 8884.19,1614 h60; Top Overlay "<35R" at 8884.19,1014 h60; Top Overlay "gold" at 8884.19,884 h60; Top Overlay "BLACK" at 8884.17,1254.02 h60; Top Overlay "white" at 8884.19,1124 h60; Top Overlay "0.75%" at 8884.19,1374 h60; Top Overlay "FR-4" at 8884.19,1494 h60; Top Overlay "5. GOLD THICKNESS" at 7724.18,1604 h60; Top Overlay "4. COPPER THICKNESS" at 7724.18,1724 h60; Top Overlay "TITLE :" at 7724.19,3213.99 h60; Top Overlay "DUSUN ELECTRON CO.;LTD" at 8065.55,3055.43 h60; Top Overlay "B45120517E" at 8183.19,2640 h100; Top Overlay "MODE :" at 8184.19,2824 h60; Top Overlay "Drawn By: YAOYF" at 7724.2,2413.99 h60; Top Overlay "DATE: 2017.04.10" at 8984.21,2413.98 h60; Top Overlay "NOTE:ONLESS OTHERWISE SPECIFIED" at 7724.19,2204 h60; Top Overlay "1. SPEC IPC-2221 AND IPC-2222" at 7724.19,2074 h60; Top Overlay "2. LAYERS" at 7724.18,1964 h60; Top Overlay "3. PCB THICKNESS" at 7724.18,1844 h60; Top Overlay "6. PCB MATIREL" at 7724.18,1484 h60; Top Overlay "7. TWIST AND ROW" at 7724.18,1364 h60; Top Overlay "8. SOLDERMASK" at 7724.18,1244 h60; Top Overlay "9. SILKSCREEN" at 7724.18,1124 h60; Top Overlay "10. SQUARE RESISTANCE" at 7724.18,1004 h60; Top Overlay "11. FINISHED" at 7724.18,884 h60
U4: Bottom Overlay "1" at 981.19,2605 h40